# Altium PCB PCB1.PcbDoc
Units mm, origin at the board's own origin, x right, y up, seen from the top; angles counter-clockwise.
Board outline 99.82 x 99.95 mm, 2 copper layers (Top Layer, Bottom Layer); 13 components, 25 nets, 127 pads, 26 vias.
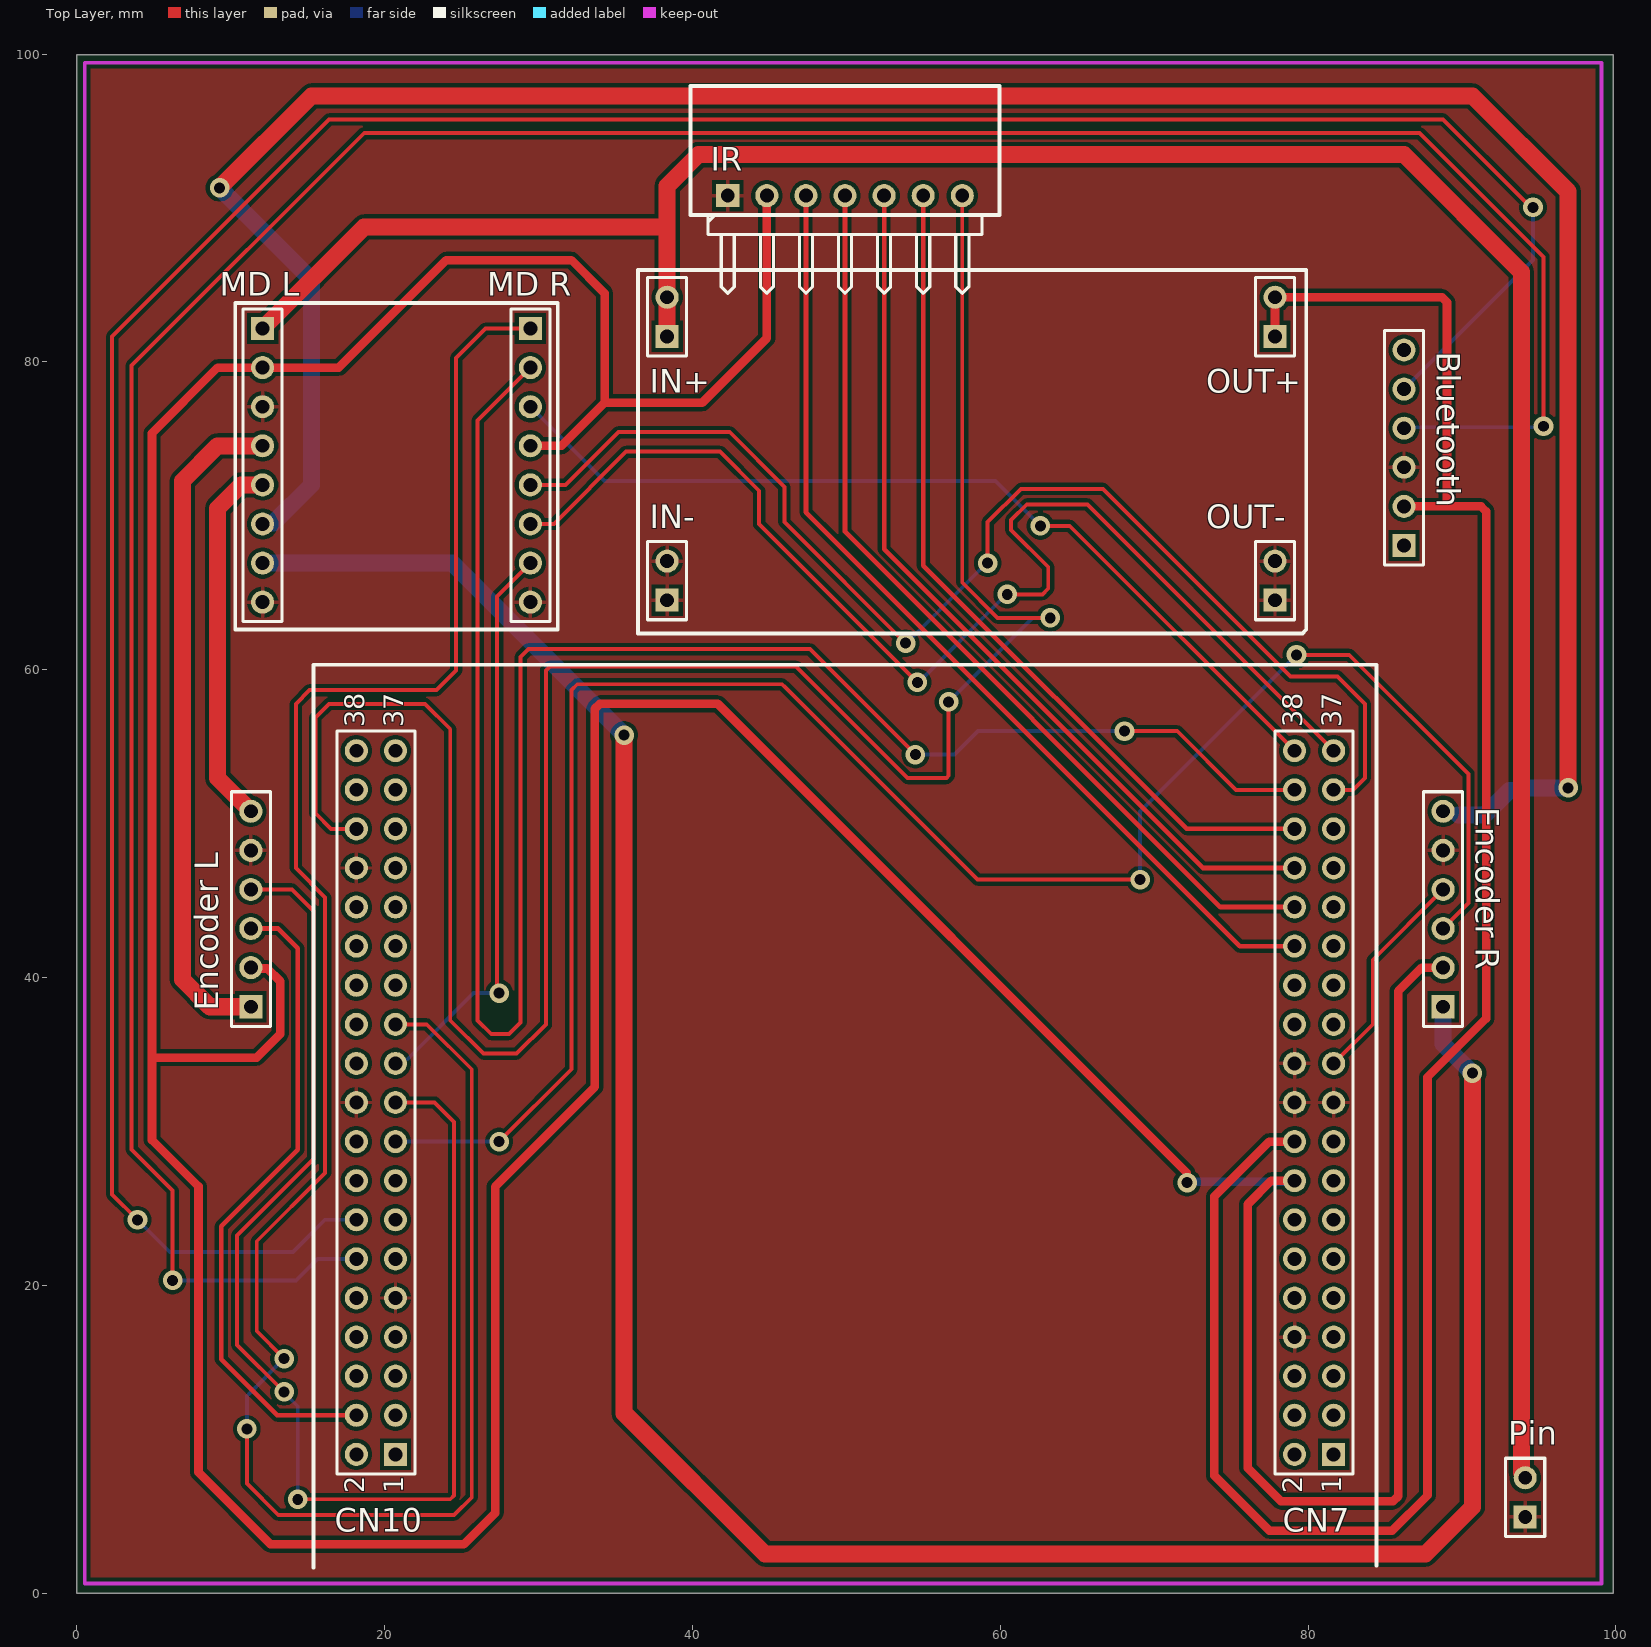
[diagram p0: Top Layer view]
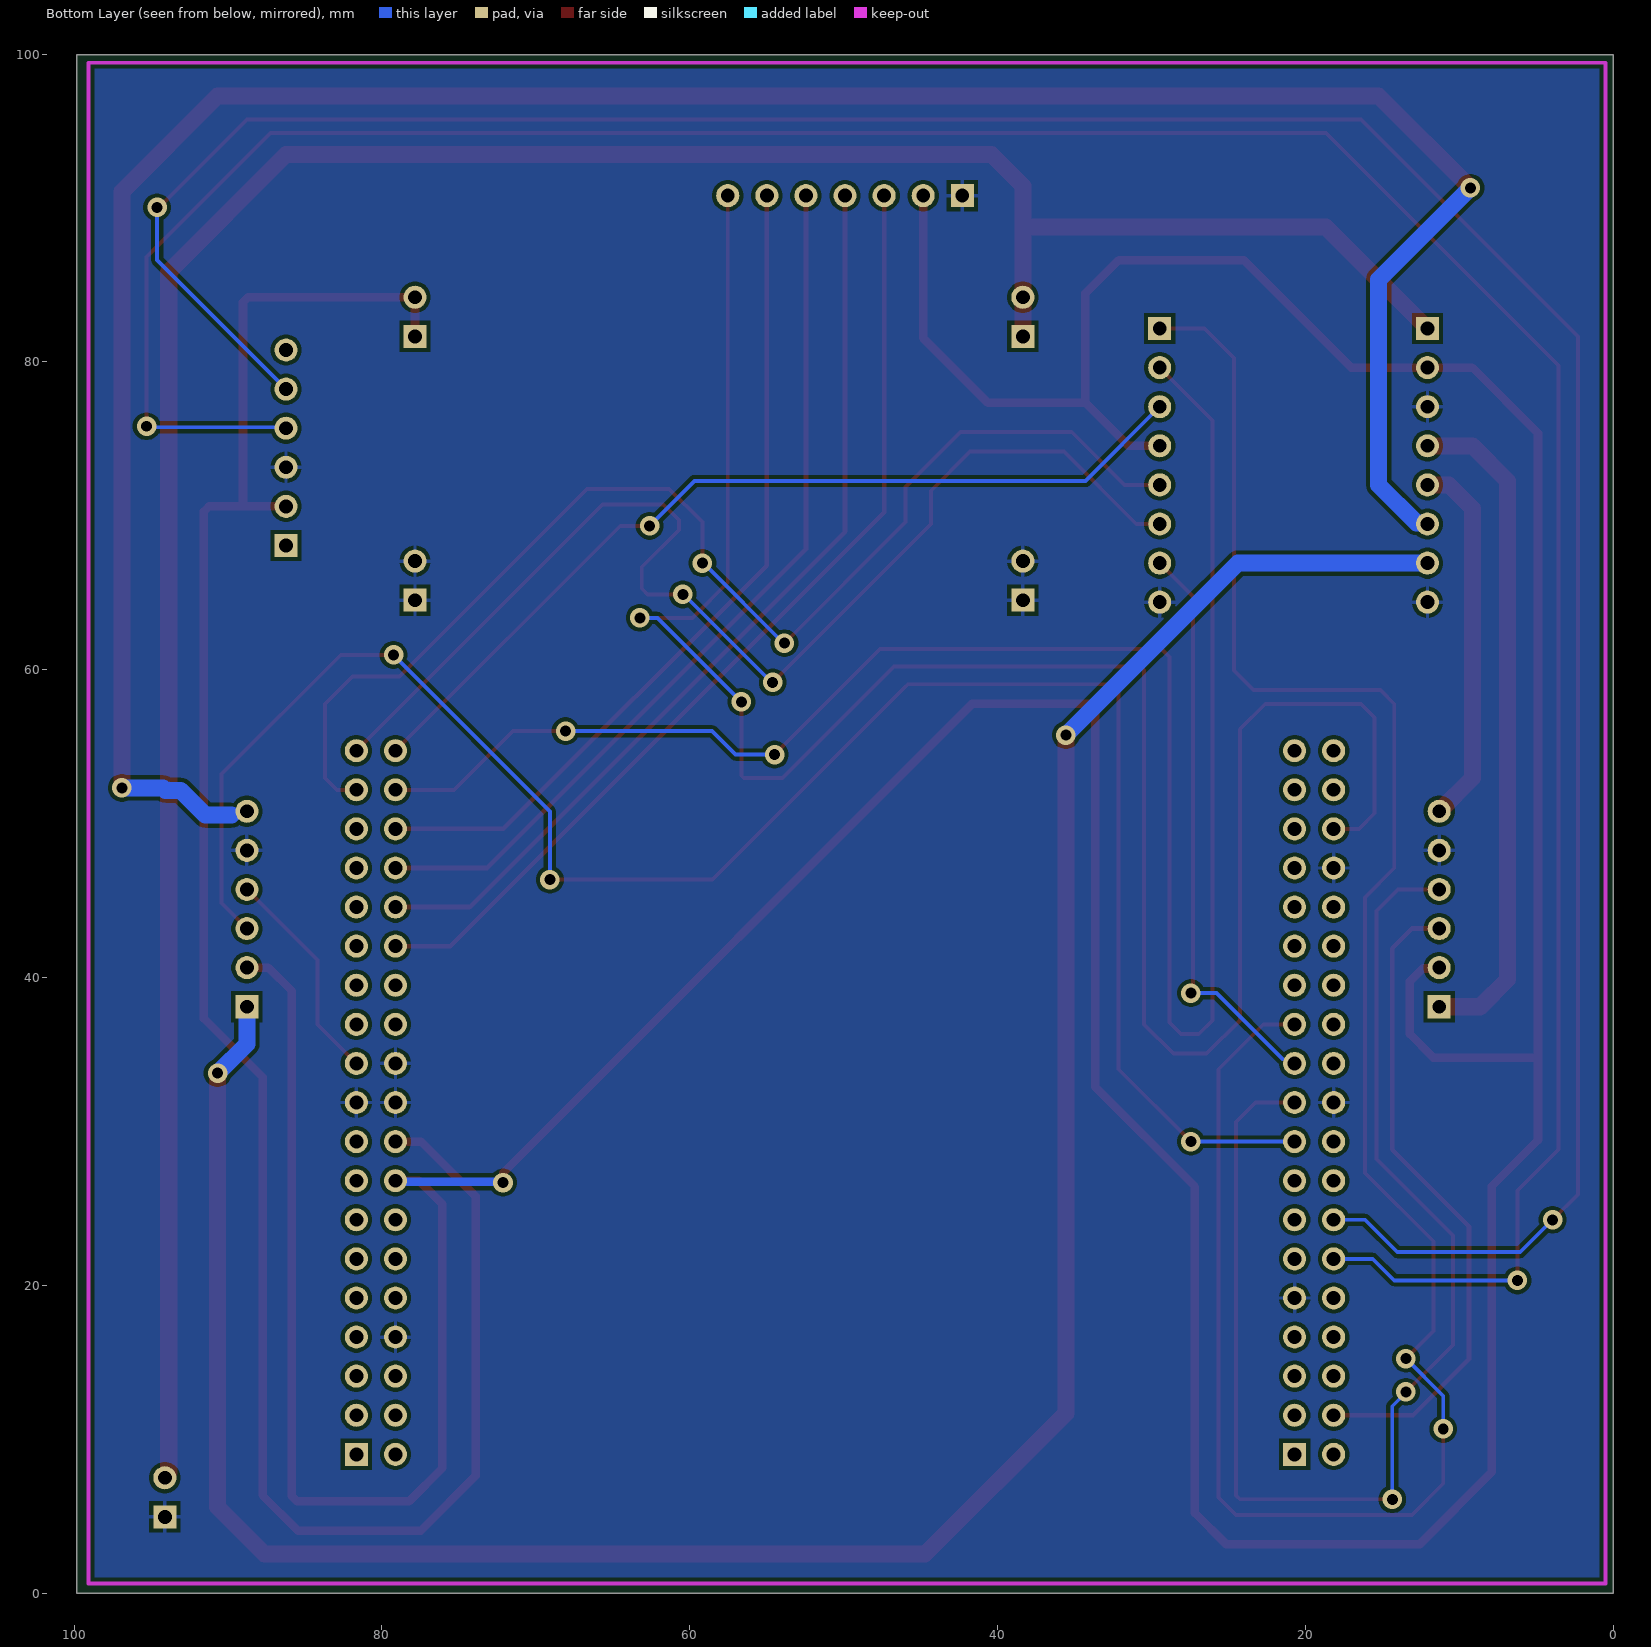
[diagram p1: Bottom Layer view, seen from below]

## Layer stack, top to bottom
Top Solder: solder mask 0.0102, Solder Resist, Dk 3.5
Top Layer: signal copper 0.0356
Dielectric 1: dielectric 0.32, FR-4, Dk 4.8
Bottom Layer: signal copper 0.0356
Bottom Solder: solder mask 0.0102, Solder Resist, Dk 3.5

## Board outline
0,0 99.822,0 99.822,99.949 0,99.949

## Design rules (kind name [scope] priority, off if disabled: settings)
Clearance [All] p1: gap=0.254 ignorepadtopadclearanceinfootprint=FALSE except(0: Arc-Hole Track-Hole SMDPad-Hole THPad-Hole Via-Hole Fill-Hole Poly-Hole Region-Hole Text-Hole)
PolygonConnect [All] p1: connectstyle=Relief reliefconductorwidth=0.254 reliefentries=4 polygonreliefangle="90 Angle" airgapwidth=0.254
RoutingVias [All] p1: holewidth=0.711 width=1.27 viastyle="Through Hole" minholewidth=0.711 minwidth=1.27 maxholewidth=0.711 maxwidth=1.27
SolderMaskExpansion [All] p1: expansion=0.102 istentingtop=FALSE
Width [All] p1: maxlimit=3 minlimit=0.2 preferedwidth=0.254 minimp=50.000000 maximp=50.000000 favimp=50.000000
30 further rules are at their usual default settings.

## Classes and differential pairs
component class Sheet1: Bluetooth IN+ IN- IR "MD L" "MD R" OUT+ OUT-

## Components (designator, comment, footprint, x,y, rotation, side; value= is the part's Value field where it differs from the comment)
Bluetooth "Header 6" HDR1X6 86.233,68.072 r90 top locked
CN7 "Header 19X2" HDR2X19 81.661,9.017 r90 top locked
CN10 "Header 19X2" HDR2X19 20.701,9.017 r90 top locked
"Encoder L" "Header 6" HDR1X6 11.303,38.1 r90 top
"Encoder R" "Header 6" HDR1X6 88.773,38.1 r90 top
IN+ "Header 2" HDR1X2 38.354,81.661 r90 top locked
IN- "Header 2" HDR1X2 38.354,64.516 r90 top locked
IR "Header 7H" HDR1X7H 42.291,90.805 r0 top
"MD L" "Header 8" HDR1X8 12.065,82.169 r270 top locked
"MD R" "Header 8" HDR1X8 29.464,82.169 r270 top locked
OUT+ "Header 2" HDR1X2 77.851,81.661 r90 top locked
OUT- "Header 2" HDR1X2 77.851,64.516 r90 top locked
Pin "Nguồn" HDR1X2 94.107,4.953 r90 top

## Footprints (in the part's own frame and the unit in brackets; to place one, negate y for a bottom-side part, rotate by r counter-clockwise, add the part's x,y. Pads: shape width x height; smd on the part's side, far side on the other; paste and mask are expansions set on the pad)
HDR1X2 [mm] "Connector; Header; 2 Position"
  rect 1.5x1.5 hole 0.9: 1(0,0)
  round 1.5 hole 0.9: 2(2.54,0)
  silkscreen extent -1.27,-1.27 3.81,1.27
HDR1X6 [mm] "Connector; Header; 6 Position"
  rect 1.5x1.5 hole 0.9: 1(0,0)
  round 1.5 hole 0.9: 2(2.54,0) 3(5.08,0) 4(7.62,0) 5(10.16,0) 6(12.7,0)
  silkscreen extent -1.27,-1.27 13.97,1.27
HDR1X7H [mm] "Connector; Header; 7 Position; Right Angle"
  rect 1.5x1.5 hole 0.9: 1(0,0)
  round 1.5 hole 0.9: 2(2.54,0) 3(5.08,0) 4(7.62,0) 5(10.16,0) 6(12.7,0) 7(15.24,0)
  silkscreen extent -1.27,-6.35 16.51,-1.27
HDR1X8 [mm] "Connector; Header; 8 Position"
  rect 1.5x1.5 hole 0.9: 1(0,0)
  round 1.5 hole 0.9: 2(2.54,0) 3(5.08,0) 4(7.62,0) 5(10.16,0) 6(12.7,0) 7(15.24,0) 8(17.78,0)
  silkscreen extent -1.27,-1.27 19.05,1.27
HDR2X19 [mm] "Connector; Header; 19x2 Position"
  rect 1.5x1.5 hole 0.9: 1(0,0)
  round 1.5 hole 0.9: 2(0,2.54) 3(2.54,0) 4(2.54,2.54) 5(5.08,0) 6(5.08,2.54) 7(7.62,0) 8(7.62,2.54) 9(10.16,0) 10(10.16,2.54) 11(12.7,0) 12(12.7,2.54) 13(15.24,0) 14(15.24,2.54) 15(17.78,0) 16(17.78,2.54) 17(20.32,0) 18(20.32,2.54) 19(22.86,0) 20(22.86,2.54) 21(25.4,0) 22(25.4,2.54) 23(27.94,0) 24(27.94,2.54) 25(30.48,0) 26(30.48,2.54) 27(33.02,0) 28(33.02,2.54) 29(35.56,0) 30(35.56,2.54) 31(38.1,0) 32(38.1,2.54) 33(40.64,0) 34(40.64,2.54) 35(43.18,0) 36(43.18,2.54) 37(45.72,0) 38(45.72,2.54)
  silkscreen extent -1.27,-1.27 46.99,3.81

## Part data
Bluetooth "Encoder L" "Encoder R": "Header, 6-Pin", LatestRevisionDate=17-Jul-2002, LatestRevisionNote="Re-released for DXP Platform.", Publisher="Altium Limited"
CN7 CN10: "Header, 19-Pin, Dual row", LatestRevisionDate=17-Jul-2002, LatestRevisionNote="Re-released for DXP Platform.", Publisher="Altium Limited"
IN+ IN- OUT+ OUT-: "Header, 2-Pin", LatestRevisionDate=17-Jul-2002, LatestRevisionNote="Re-released for DXP Platform.", Publisher="Altium Limited"
IR: "Header, 7-Pin, Right Angle", LatestRevisionDate=17-Jul-2002, LatestRevisionNote="Re-released for DXP Platform.", Publisher="Altium Limited"
"MD L" "MD R": "Header, 8-Pin", LatestRevisionDate=17-Jul-2002, LatestRevisionNote="Re-released for DXP Platform.", Publisher="Altium Limited"
Pin: library part "Header 2", "Header, 2-Pin", LatestRevisionDate=17-Jul-2002, LatestRevisionNote="Re-released for DXP Platform.", Publisher="Altium Limited"

## Via types
v1: diameter 1.27, hole 0.711, Top Layer to Bottom Layer, 26 vias

## Nets (pads, with @x,y where several pads share a name; then routed paths per layer and width w, separated by ;. In a path a pad name is that pad's centre, name@x,y a point inside that pad or via, vN(x,y) a via of type N, cw(c..) or ccw(c..) an arc to the next point about the centre after c; other vN are vias at no path point)
GND: "Encoder L.5" "Encoder R.5" "MD L.3" "MD L.8" "MD R.8" Bluetooth.3 CN7.8 CN7.19 CN7.20 CN7.22 CN10.9 CN10.20 CN10.32 IN-.1 IN-.2 IR.1 OUT-.1 OUT-.2 Pin.1
NetBluetooth_2: Bluetooth.2 CN7.18 OUT+.1 OUT+.2 | length 139.2
  Top Layer w0.559: OUT+.1 OUT+.2 88.7,84.201 89.027,83.874 89.027,70.612 ; CN7.18 77.47,29.337 73.914,25.781 73.914,7.62 77.47,4.064 85.471,4.064 87.757,6.35 87.757,33.528 91.567,37.338 91.567,70.285 91.24,70.612 89.027,70.612 ; Bluetooth.2 89.027,70.612
NetBluetooth_4: Bluetooth.4 CN10.12 | length 194.5
  Top Layer w0.254: v1(6.223,20.32) 6.223,26.162 3.556,28.829 3.556,79.756 18.669,94.869 87.249,94.869 90.323,91.795 95.295,86.823 v1(95.295,75.819)
  Bottom Layer w0.254: v1(6.223,20.32) 14.224,20.32 15.621,21.717 CN10.12 ; Bluetooth.4 86.296,75.755 95.232,75.755 v1(95.295,75.819)
NetBluetooth_5: Bluetooth.5 CN10.14 | length 189.9
  Top Layer w0.254: v1(3.937,24.257) 2.286,25.908 2.286,81.661 16.383,95.758 88.773,95.758 94.488,90.043 v1(94.615,90.043)
  Bottom Layer w0.254: v1(3.937,24.257) 6.036,22.158 14.03,22.158 16.129,24.257 CN10.14 ; Bluetooth.5 94.615,86.614 v1(94.615,90.043)
NetCN7_16: "Encoder L.2" "Encoder R.2" "MD L.2" "MD R.4" CN7.16 IR.2 | length 356.2
  Top Layer w0.559: 4.953,34.798 11.684,34.798 13.208,36.322 13.208,39.751 12.375,40.584 11.359,40.584 11.303,40.64 ; 29.464,74.549 31.496,74.549 34.29,77.343 ; IR.2 44.831,81.534 40.64,77.343 34.29,77.343 ; 72.126,27.305 41.646,57.785 33.982,57.785 33.655,57.458 33.655,32.893 27.178,26.416 27.178,5.207 25.146,3.175 12.573,3.175 7.9,7.848 7.9,26.42 4.882,29.437 4.882,34.798 4.882,75.367 9.144,79.629 12.065,79.629 17.018,79.629 24.003,86.614 32.131,86.614 34.29,84.455 34.29,77.343 ; CN7.16 77.597,26.797 76.073,25.273 76.073,8.128 78.232,5.969 85.525,5.969 85.852,6.296 85.852,39.116 87.376,40.64 88.773,40.64
  Bottom Layer w0.559: v1(72.136,26.67) 72.2,26.733 79.057,26.733 CN7.16
NetCN7_21: "Encoder R.4" CN7.21 | length 14.2
  Top Layer w0.254: CN7.21 84.201,36.957 84.201,41.148 88.773,45.72
NetCN7_28: CN7.28 IR.3 | length 64
  Top Layer w0.305: IR.3 47.371,70.231 75.565,42.037 CN7.28
NetCN7_30: CN7.30 IR.4 | length 61.2
  Top Layer w0.305: IR.4 49.911,68.961 74.295,44.577 CN7.30
NetCN7_32: CN7.32 IR.5 | length 58.2
  Top Layer w0.305: IR.5 52.451,67.818 73.152,47.117 CN7.32
NetCN7_34: CN7.34 IR.6 | length 55.3
  Top Layer w0.305: IR.6 54.991,66.77 72.104,49.657 CN7.34
NetCN7_35: "MD R.5" CN7.35 | length 81.3
  Top Layer w0.254: 29.464,72.009 31.75,72.009 35.179,75.438 42.418,75.438 45.974,71.882 45.974,69.596 v1(53.848,61.722) ; v1(59.182,66.929) 59.182,69.596 61.341,71.755 66.675,71.755 78.867,59.563 81.915,59.563 83.693,57.785 83.693,52.959 82.931,52.197 CN7.35
  Bottom Layer w0.254: v1(53.848,61.722) 53.911,61.722 59.118,66.929 v1(59.182,66.929)
NetCN7_36: "MD R.2" CN7.36 | length 126.6
  Top Layer w0.254: 29.464,79.629 26.035,76.2 26.035,37.211 26.924,36.322 28.067,36.322 28.829,37.084 28.829,60.833 29.337,61.341 47.625,61.341 v1(54.483,54.483) ; v1(68.072,56.007) 68.076,56.011 71.497,56.011 75.311,52.197 CN7.36
  Bottom Layer w0.254: v1(54.483,54.483) 57.023,54.483 58.547,56.007 v1(68.072,56.007)
NetCN7_37: "MD R.6" CN7.37 | length 79
  Top Layer w0.254: 29.464,69.469 30.988,69.469 35.687,74.168 41.783,74.168 44.323,71.628 44.323,69.469 v1(54.61,59.182) ; v1(60.452,64.897) 62.738,64.897 63.119,65.278 63.119,66.675 60.706,69.088 60.706,69.723 61.722,70.739 65.659,70.739 CN7.37
  Bottom Layer w0.254: v1(54.61,59.182) 54.673,59.182 60.389,64.897 v1(60.452,64.897)
NetCN7_38: "MD R.3" CN7.38 | length 58.9
  Top Layer w0.254: v1(62.611,69.342) 64.516,69.342 CN7.38
  Bottom Layer w0.254: 29.464,77.089 34.29,72.263 59.69,72.263 v1(62.611,69.342)
NetCN10_4: "Encoder L.3" CN10.4 | length 42.6
  Top Layer w0.305: 11.303,43.18 13.081,43.18 14.351,41.91 14.351,28.803 9.372,23.825 9.372,15.19 13.005,11.557 CN10.4
NetCN10_17: "Encoder R.3" CN10.17 | length 124.3
  Top Layer w0.254: v1(27.432,29.337) 32.131,34.036 32.131,58.674 32.512,59.055 45.825,59.055 45.974,58.906 58.525,46.355 v1(69.088,46.355) ; v1(79.248,60.96) 82.677,60.96 90.424,53.213 90.424,44.831 88.773,43.18
  Bottom Layer w0.254: CN10.17 v1(27.432,29.337) ; v1(69.088,46.355) 69.088,50.8 v1(79.248,60.96)
NetCN10_19: "Encoder L.4" CN10.19 | length 85.4
  Top Layer w0.254: 11.303,45.72 13.97,45.72 15.367,44.323 15.367,28.194 10.414,23.241 10.414,16.129 v1(13.462,13.081) ; v1(14.351,6.096) 24.257,6.096 24.511,6.35 24.511,30.607 23.241,31.877 CN10.19
  Bottom Layer w0.254: v1(13.462,13.081) 13.462,13.033 14.351,12.144 v1(14.351,6.096)
NetCN10_21: "MD R.7" CN10.21 | length 36.6
  Top Layer w0.254: v1(27.432,38.989) 27.305,39.116 27.305,64.77 29.464,66.929
  Bottom Layer w0.254: 21.497,34.705 25.781,38.989 v1(27.432,38.989)
NetCN10_23: "MD R.1" CN10.23 | length 142.2
  Top Layer w0.254: v1(11.041,10.665) 11.041,7.12 13.081,5.08 24.511,5.08 25.654,6.223 25.654,34.036 22.733,36.957 CN10.23 ; v1(13.462,15.24) 11.684,17.018 11.684,22.86 16.129,27.305 16.129,45.212 14.224,47.117 14.224,57.785 15.113,58.674 23.368,58.674 24.638,59.944 24.638,80.264 26.543,82.169 29.464,82.169
  Bottom Layer w0.254: v1(11.041,10.665) 11.041,12.819 v1(13.462,15.24)
NetCN10_34: CN10.34 IR.7 | length 143.7
  Top Layer w0.254: CN10.34 16.51,49.657 15.494,50.673 15.494,56.896 16.383,57.785 22.606,57.785 24.257,56.134 24.257,37.211 26.416,35.052 28.575,35.052 30.48,36.957 30.48,59.944 30.734,60.198 46.736,60.198 53.975,52.959 56.493,52.959 56.642,53.108 v1(56.642,57.912) ; IR.7 57.531,65.659 59.817,63.373 v1(63.246,63.373)
  Bottom Layer w0.254: v1(56.642,57.912) 62.103,63.373 v1(63.246,63.373)
"NetEncoder L_1": "Encoder L.1" "MD L.4" | length 43.7
  Top Layer w1.106: 11.303,38.1 8.636,38.1 6.858,39.878 6.858,72.263 9.144,74.549 12.065,74.549
"NetEncoder L_6": "Encoder L.6" "MD L.5" | length 24.1
  Top Layer w1.106: 11.303,50.8 9.144,52.959 9.144,70.485 10.668,72.009 12.065,72.009
"NetEncoder R_1": "Encoder R.1" "MD L.7" | length 165.7
  Top Layer w1.106: v1(35.56,55.753) 35.56,11.684 44.704,2.54 87.63,2.54 90.678,5.588 v1(90.678,33.782)
  Bottom Layer w1.106: 12.065,66.929 24.384,66.929 v1(35.56,55.753) ; 88.773,38.1 88.773,35.687 v1(90.678,33.782)
"NetEncoder R_6": "Encoder R.6" "MD L.6" | length 165.3
  Top Layer w1.106: v1(9.271,91.313) 15.24,97.282 90.678,97.282 96.901,91.059 v1(96.901,52.324)
  Bottom Layer w1.106: v1(9.271,91.313) 15.24,85.344 15.24,72.009 12.775,69.544 12.14,69.544 12.065,69.469 ; 89.789,50.546 91.47,50.546 93.089,52.166 94.054,52.166 94.212,52.324 v1(96.901,52.324)
NetIN+_1: "MD L.1" IN+.1 IN+.2 Pin.2 | length 176
  Top Layer w1.106: 12.065,82.169 18.669,88.773 25.654,88.773 38.354,88.773 ; 38.354,82.452 IN+.2 38.354,88.773 ; Pin.2 94.107,7.6 93.853,7.854 93.853,85.852 86.233,93.472 40.386,93.472 38.354,91.44 38.354,88.773
pads on no net: Bluetooth.1 Bluetooth.6 CN7.1 CN7.2 CN7.3 CN7.4 CN7.5 CN7.6 CN7.7 CN7.9 CN7.10 CN7.11 CN7.12 CN7.13 CN7.14 CN7.15 CN7.17 CN7.23 CN7.24 CN7.25 CN7.26 CN7.27 CN7.29 CN7.31 CN7.33 CN10.1 CN10.2 CN10.3 CN10.5 CN10.6 CN10.7 CN10.8 CN10.10 CN10.11 CN10.13 CN10.15 CN10.16 CN10.18 CN10.22 CN10.24 CN10.25 CN10.26 CN10.27 CN10.28 CN10.29 CN10.30 CN10.31 CN10.33 CN10.35 CN10.36 CN10.37 CN10.38

## Polygon pours and split planes (outlines as drawn)
GND on Bottom Layer "GND_L02_P000" (solid, remove dead copper, pour order 0): 0.127,99.822 0.254,99.695 99.568,99.695 99.568,0.381 99.314,0.127 99.187,0.254 0.127,0.254
GND on Top Layer "GND_L01_P001" (solid, remove dead copper, pour order 1): 0.254,99.695 99.441,99.695 99.441,0.381 0.127,0.381 0.127,99.568

## Keep-outs
Keep-Out Layer:
  lines w0.254: 0.508,0.635 0.508,99.441 99.06,99.441 99.06,0.635 0.508,0.635

## Silkscreen, mask and mechanical layers (free items; w line width, h text height)
Top Overlay:
  lines w0.254: 15.367,1.651 15.367,60.325 84.455,60.325 84.455,2.286 ; 84.455,1.778 84.455,2.286 ; 84.455,2.286 84.455,2.286 ; 10.287,62.611 10.287,83.82 31.242,83.82 31.242,62.611 10.287,62.611 ; 36.449,62.357 36.449,85.979 79.883,85.979 79.883,62.611 79.629,62.357 36.449,62.357 ; 39.878,89.535 39.878,97.917 59.944,97.917 59.944,89.535 58.547,89.535 41.021,89.535 39.878,89.535

## Text inside footprints (layer, text, board x,y; h text height)
CN7: Top Overlay "2" at 79.629,6.477 h1.27 r90; Top Overlay "1" at 82.169,6.477 h1.27 r90; Top Overlay "37" at 82.169,56.261 h1.27 r90; Top Overlay "38" at 79.629,56.261 h1.27 r90
CN10: Top Overlay "38" at 18.669,56.261 h1.27 r90; Top Overlay "37" at 21.209,56.261 h1.27 r90; Top Overlay "1" at 21.209,6.477 h1.27 r90; Top Overlay "2" at 18.669,6.477 h1.27 r90